# EAGLE board BoardV1 (EAGLE 9.3.0)
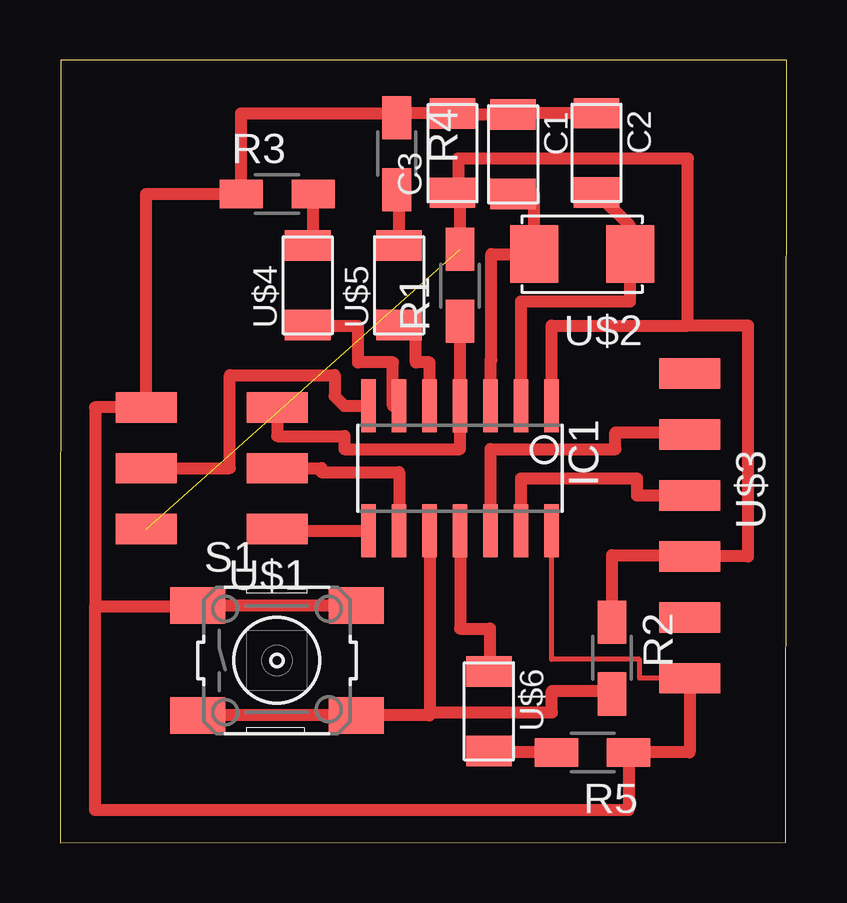
[diagram p0: board, top side]

Size 30.28 x 32.61 mm. Coordinates in mm from the lower left corner, seen from the top.
Outline: 0,0 30.24,0.02 30.28,32.61 0.04,32.59 0,0
Copper layers (1*16): Top 0.035mm / dielectric 1.5mm / Bottom 0.035mm
Design rules "default *": minimum track width 0.01mm, minimum drill 0.35mm, track to track 0.45mm, track to pad 0.45mm, pad to pad 0.45mm, via to via 0.45mm, smd to smd 0.45mm, copper to edge 40mil, drill to drill 6mil, minimum pad ring 10mil, minimum via ring 8mil, stop-mask expansion 4mil, vias tented up to drill 0mil, thermal gap 10mil

## Footprints (pad centres in the part's own frame; a part is rotated, then mirrored left to right if it is on the bottom)
C1206FAB = smd 1.27 x 1.905: 1 -1.651,0; 2 1.651,0
SOIC14 = smd 0.61 x 2.21: 1 -3.81,-2.603; 2 -2.54,-2.603; 3 -1.27,-2.603; 4 0,-2.603; 5 1.27,-2.603; 6 2.54,-2.603; 7 3.81,-2.603; 8 3.81,2.603; 9 2.54,2.603; 10 1.27,2.603; 11 0,2.603; 12 -1.27,2.603; 13 -2.54,2.603; 14 -3.81,2.603
R1206W = smd 1.8 x 1.2: 1 -1.499,0; 2 1.499,0
6MM_SWITCH = smd 2.286 x 1.524: 1 -3.302,2.286; 2 3.302,2.286; 3 -3.302,-2.286; 4 3.302,-2.286
2X03SMD = smd 2.54 x 1.27: 1 -2.54,2.54; 2 2.92,2.54; 3 -2.54,0; 4 2.92,0; 5 -2.54,-2.54; 6 2.92,-2.54
2-SMD-5X3MM = smd 2 x 2.4: P$1 -2,0; P$2 2,0
1X06SMD = smd 2.54 x 1.27: 1 0,6.35; 2 0,3.81; 3 0,1.27; 4 0,-1.27; 5 0,-3.81; 6 0,-6.35
LED1206FAB = smd 1.27 x 1.905: 1 -1.651,0; 2 1.651,0

## Placement (x,y rotation side)
C1  22pF  [C1206FAB]  18.88,28.68 270 top
C2  22pF  [C1206FAB]  22.35,28.74 270 top
C3  1uF  [C1206FAB]  16.35,28.73 90 top
IC1  ATTINY44-SSU  [SOIC14]  16.67,15.6 180 top
R1  10K  [R1206W]  16.67,23.22 90 top
R2  10K  [R1206W]  23,7.69 270 top
R3  10K  [R1206W]  9.05,27.03 0 top
R4  10K  [R1206W]  14.03,28.7 270 top
R5  10K  [R1206W]  22.19,3.76 180 top
S1  [6MM_SWITCH]  9.04,7.59 0 top
U$1  AVRISPSMD  [2X03SMD]  6.51,15.6 180 top
U$2  CRYSTAL  [2-SMD-5X3MM]  21.75,24.52 180 top
U$3  FTDI-SMD-HEADER  [1X06SMD]  26.23,13.2 180 top
U$4  LEDFAB1206  [LED1206FAB]  10.32,23.22 90 top
U$5  LEDFAB1206  [LED1206FAB]  14.13,23.22 90 top
U$6  LEDFAB1206  [LED1206FAB]  17.87,5.47 270 top

## Library data of the parts
C1-C3 IC1 R1-R5 U$1-U$6 = fabAca
S1 = fabAca; SPICEPREFIX: S

## Nets
BUTTON: IC1.10 R2.2 S1.3 S1.4
GND: C1.1 C2.1 C3.2 IC1.14 R3.1 R4.1 R5.1 S1.1 S1.2 U$1.6 U$3.1
LED1: IC1.6 U$4.1
LED2: IC1.5 U$5.1
LED3: IC1.11 U$6.1
MISO: IC1.8 U$1.1
MOSI: IC1.7 U$1.4
N$2: C1.2 IC1.3 U$2.P$2
N$3: C2.2 IC1.2 U$2.P$1
N$6: R3.2 U$4.2
N$8: R4.2 U$5.2
N$10: R5.2 U$6.2
RST: IC1.4 R1.1 U$1.5
RX: IC1.12 U$3.5
SCK: IC1.9 U$1.3
TX: IC1.13 U$3.4
VCC: C3.1 IC1.1 R1.2 R2.1 U$1.2 U$3.3

## Tracks (layer width: path | path; a pad name or v marks a point on that pad's centre or on a via)
BUTTON
  Top 0.254: S1.4 12.17,5.3
  Top 0.508: IC1.10 15.4,5.43 | 15.4,5.43 15.4,5.3 12.17,5.3 | S1.4 S1.3 | 15.4,5.43 20.49,5.43 20.49,6.32 23,6.32 R2.2
GND
  Top 0.2: U$3.1 24.15,6.85 24.15,7.64 20.48,7.64 20.48,10.18 IC1.14
  Top 0.5: C2.1 18.88,30.39 C1.1 16.35,30.33 C3.2 14.03,30.38 | 14.03,30.38 R4.1 | 14.03,30.38 7.55,30.38 R3.1 3.59,27.03 3.59,25.56 3.59,24.26 U$1.6 1.47,18.14 1.47,9.84 | 1.47,9.84 5.74,9.84 S1.1 S1.2 | R5.1 23.69,1.36 1.47,1.36 1.47,9.84
  Top 0.508: U$3.1 26.23,3.76 R5.1
LED1
  Top 0.508: IC1.6 13.87,18.2 13.87,20.01 12.42,20.01 12.42,21.52 10.32,21.52 U$4.1
LED2
  Top 0.508: IC1.5 15.4,20.01 14.83,20.01 14.83,21.57 U$5.1
LED3
  Top 0.508: IC1.11 16.67,8.92 17.91,8.92 17.91,7.12 U$6.1
MISO
  Top 0.5: U$1.1 9.05,13 IC1.8
MOSI
  Top 0.508: U$1.4 7.08,15.6 7.08,19.48 11.45,19.48 11.45,18.61 11.85,18.2 IC1.7
N$2
  Top 0.508: IC1.3 17.94,20.12 17.97,20.12 17.97,24.52 U$2.P$2 19.75,27.03 C1.2
N$3
  Top 0.508: C2.2 23.75,25.69 U$2.P$1 23.75,22.55 19.21,22.55 IC1.2
N$6
  Top 0.508: U$4.2 10.55,24.87 R3.2
N$8
  Top 0.254: 14.13,27.1 R4.2
  Top 0.508: U$5.2 14.13,27.1
N$10
  Top 0.254: 17.93,3.76 U$6.2
  Top 0.508: R5.2 17.93,3.76
RST
  Top 0.5: 16.67,16.39 IC1.4
  Top 0.508: U$1.5 9.05,16.94 11.85,16.94 11.85,16.39 16.67,16.39 | IC1.4 R1.1
RX
  Top 0.508: IC1.12 17.94,16.39 23.14,16.39 23.14,17.09 26.23,17.09 U$3.5
SCK
  Top 0.508: U$1.3 10.89,15.6 10.89,15.44 14.13,15.44 IC1.9
TX
  Top 0.508: IC1.13 19.21,15.18 24.04,15.18 24.04,14.47 U$3.4
VCC  (1 unrouted)
  Top 0.5: 28.66,12.16 28.66,11.93 U$3.3 26.23,11.98 23,11.98 R2.1
  Top 0.508: R1.2 16.67,27.08 C3.1 16.59,27.08 16.59,28.5 26.16,28.5 26.16,21.54 | IC1.1 20.48,21.54 26.16,21.54 | 28.66,12.16 28.66,21.54 26.16,21.54